# Altium PCB PCB1.PcbDoc
Units mil, origin at the board's own origin, x right, y up, seen from the top; angles counter-clockwise.
Board outline 6000 x 4000 mil, 4 copper layers (Top Layer, Ground, Power, Bottom Layer); 30 components, 63 nets, 223 pads, 0 vias.
Unrouted connection lines stored in the file: 110.
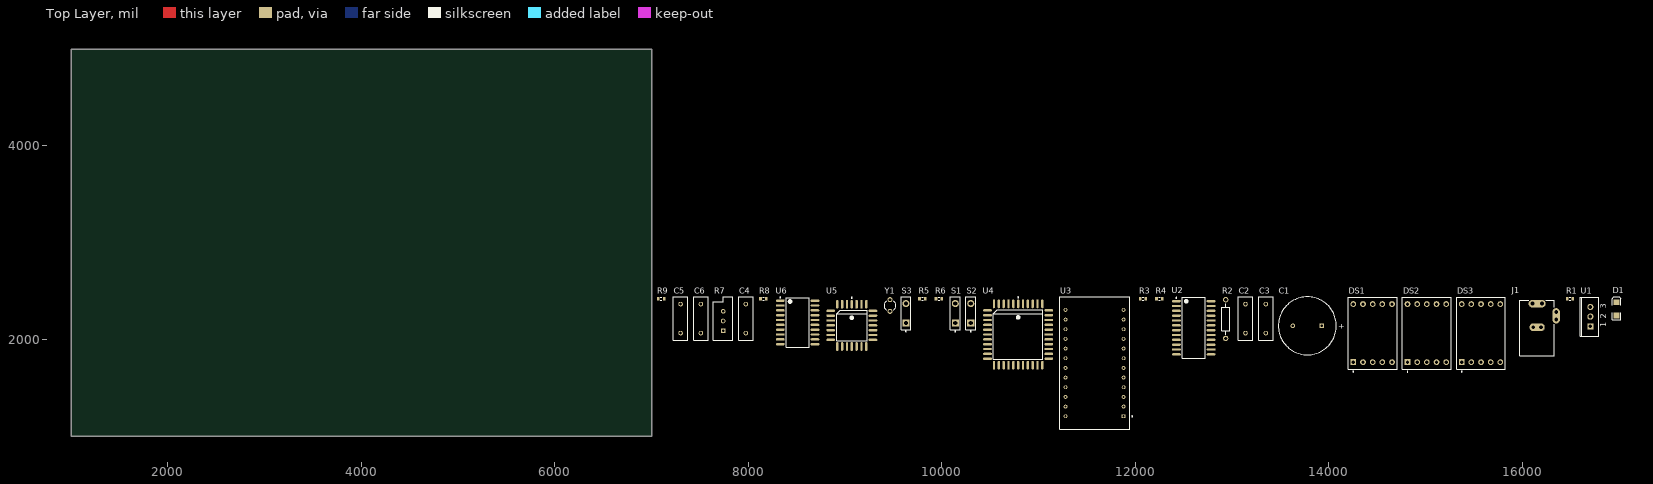
[diagram p0: Top Layer view]
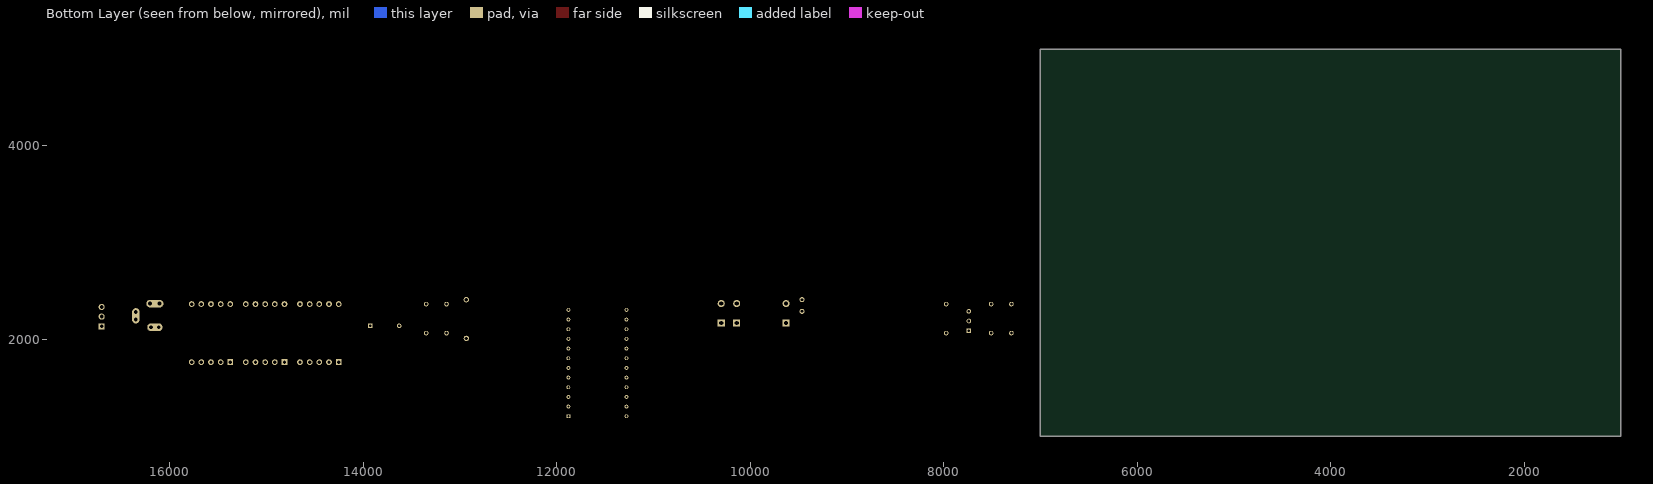
[diagram p1: Bottom Layer view, seen from below]
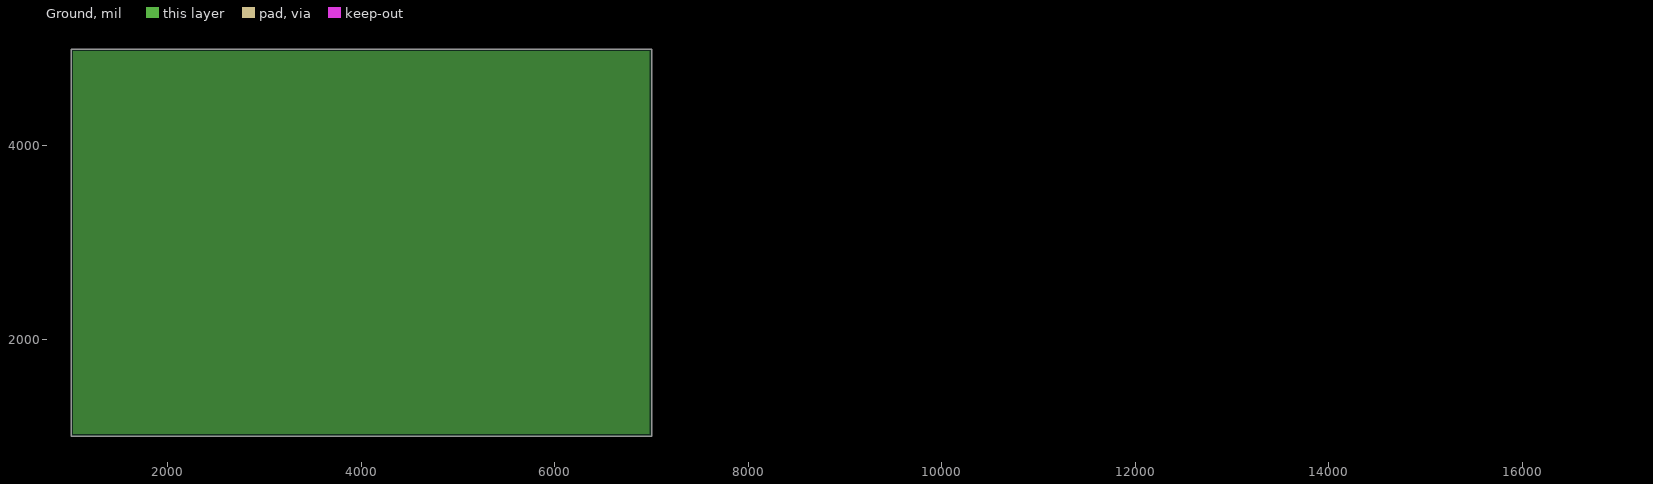
[diagram p2: Ground, clearances drawn from the general rule]
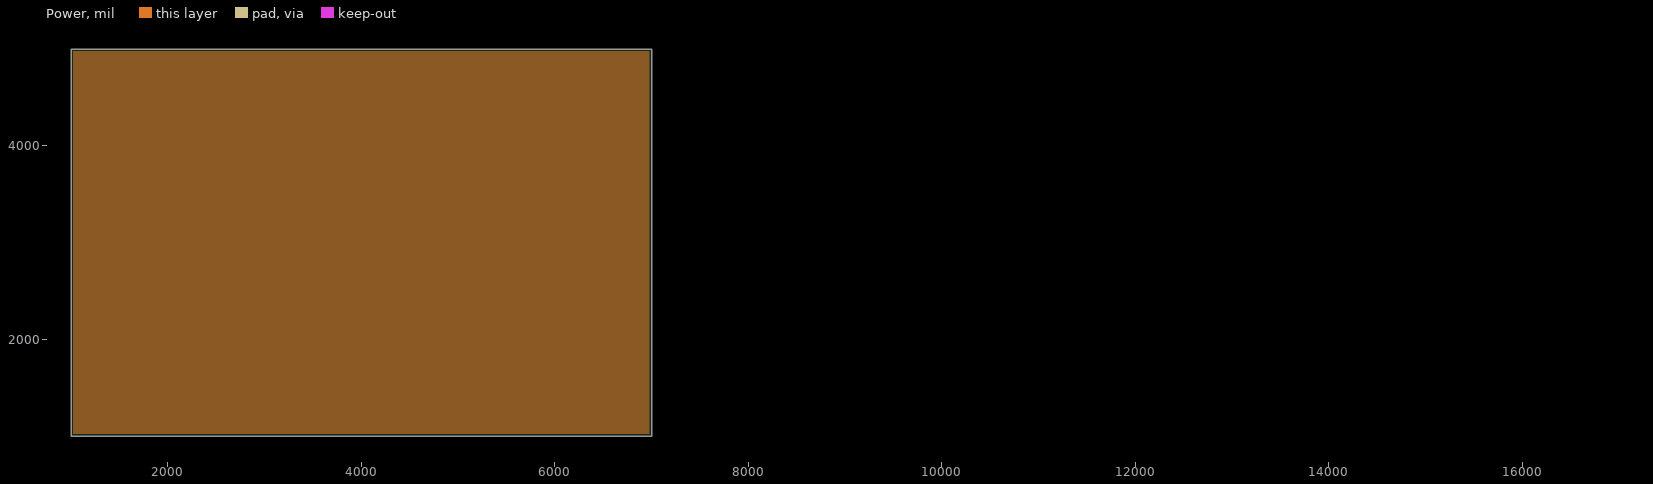
[diagram p3: Power, clearances drawn from the general rule]

## Layer stack, top to bottom
Top Layer: signal copper 1.4
Dielectric: core 12.6, FR-4, Dk 4.8
Ground: plane copper 1.4, net GND
Dielectric: prepreg 12.6, FR-4, Dk 4.8
Power: plane copper 1.4, net VCC
Dielectric: core 12.6, FR-4, Dk 4.8
Bottom Layer: signal copper 1.4

## Board outline
1000,1000 7000,1000 7000,5000 1000,5000

## Design rules (kind name [scope] priority, off if disabled: settings)
Clearance [All] p1: gap=10
PlaneClearance [All] p1: clearance=20
PlaneConnect [All] p1: planeconnectstyle=Relief reliefexpansion=20 reliefentries=4 reliefconductorwidth=10 reliefairgap=10
PolygonConnect [All] p1: connectstyle=Relief reliefconductorwidth=10 reliefentries=4 polygonreliefangle="90 Angle"
RoomDefinition Voltage_Meter [InComponentClass('Voltage_Meter')] p1: confinementstyle=ConfineIn formatcopy=TRUE lockcomponents=FALSE outline 7045,1060 17035,1060 17035,2550 7045,2550
RoutingVias [All] p1: holewidth=28 width=50 viastyle="Through Hole" minholewidth=28 minwidth=50 maxholewidth=28 maxwidth=50
SilkscreenOverComponentPads [All] p1: minsilkscreentomaskgap=10
SolderMaskExpansion [All] p1: expansion=4
Width [All] p1: maxlimit=10 minlimit=10 preferedwidth=10
25 further rules are at their usual default settings.

## Classes and differential pairs
net class VD[0..7]: VD0 VD1 VD2 VD3 VD4 VD5 VD6 VD7
net class AD[0..7]: AD0 AD1 AD2 AD3 AD4 AD5 AD6 AD7
net class A[0..10]: A0 A1 A2 A3 A4 A5 A6 A7 A8 A9 A10

## Components (designator, comment, footprint, x,y, rotation, side; value= is the part's Value field where it differs from the comment)
C1 "Cap Pol1" RB7.6-15 13780,2140 r0 top
C2 "Cap" RAD-0.3 13140,2215 r90 top
C3 "Cap" RAD-0.3 13350,2215 r90 top
C4 "Cap" RAD-0.3 7975,2215 r90 top
C5 "Cap" RAD-0.3 7300,2215 r90 top
C6 "Cap" RAD-0.3 7510,2215 r90 top
D1 "LED2" 3.2X1.6X1.1 16975,2315 r90 top
DS1 "Dpy Blue-CC" H 14455,2065 r0 top
DS2 "Dpy Blue-CC" H 15015,2065 r0 top
DS3 "Dpy Blue-CC" H 15575,2065 r0 top
J1 "PWR2.5" KLD-0202 16155,1830 r90 top
R1 "Res3" J1-0603 16495,2420 r0 top
R2 "Res2" AXIAL-0.4 12935,2210 r90 top
R3 "Res3" J1-0603 12080,2420 r0 top
R4 "Res3" J1-0603 12250,2420 r0 top
R5 "Res3" J1-0603 9800,2420 r0 top
R6 "Res3" J1-0603 9970,2420 r0 top
R7 "RPot" VR5 7740,2190 r90 top
R8 "Res3" J1-0603 8155,2420 r0 top
R9 "Res3" J1-0603 7100,2420 r0 top
S1 "SW-PB" SPST-2 10140,2270 r90 top
S2 "SW-PB" SPST-2 10300,2270 r90 top
S3 "SW-PB" SPST-2 9630,2270 r90 top
U1 "MC7805CT" 221A-04 16705,2235 r90 top
U2 "MAX7219CWG" WSO24_N 12605,2120 r0 top
U3 "M48Z12-200PC1" PCDIP24 11580,1755 r90 top
U4 "P89C52X2FA" SOT187-2_N 10790,2050 r0 top
U5 "ADC0809FN" FN028_N 9070,2145 r0 top
U6 "SN74HC373DW" DW020_N 8510,2175 r0 top
Y1 "XTAL" R38 9465,2350 r0 top

## Footprints (in the part's own frame and the unit in brackets; to place one, negate y for a bottom-side part, rotate by r counter-clockwise, add the part's x,y. Pads: shape width x height; smd on the part's side, far side on the other; paste and mask are expansions set on the pad)
3.2X1.6X1.1 [mm] "SMT LED; 2 Flat Leads"
  rect 1.5x1.5 smd: 1(-1.75,0) 2(1.75,0)
  silkscreen extent -2.9,-1.15 3.2,1.15
221A-04 [mm] "TO, Thru-Hole, Vertical, Heatsink Mounted; 3 In-Line Leads; Pitch 2.54 mm"
  rect 1.6x1.6 hole 1: 1(-2.54,0)
  round 1.6 hole 1: 2(0,0) 3(2.54,0)
  silkscreen extent -5.15,-2.2 5.15,2.7
AXIAL-0.4 [mm] "Axial Device, Thru-Hole; 2 Leads; 0.4 in Pin Spacing"
  round 1.4 hole 0.85: 1(-5.08,0) 2(5.08,0)
  silkscreen extent -4.06,-1.02 4.06,1.02
DW020_N [mm] "SOIC, 20-Leads, Body 12.8x7.5mm, Pitch 1.27mm, IPC Medium Density"
  oval 2.3x0.6 smd: 1(-4.55,5.715) 2(-4.55,4.445) 3(-4.55,3.175) 4(-4.55,1.905) 5(-4.55,0.635) 6(-4.55,-0.635) 7(-4.55,-1.905) 8(-4.55,-3.175) 9(-4.55,-4.445) 10(-4.55,-5.715) 11(4.55,-5.715) 12(4.55,-4.445) 13(4.55,-3.175) 14(4.55,-1.905) 15(4.55,-0.635) 16(4.55,0.635) 17(4.55,1.905) 18(4.55,3.175) 19(4.55,4.445) 20(4.55,5.715)
  silkscreen extent -4.67,-6.5 3,6.69, body extent -3.75,-6.4 3.75,6.4, height 2.65
FN028_N [mm] "Leaded Chip Carrier, 28-Leads, Body 11.5x11.5mm, Pitch 1.27mm, IPC Medium Density"
  oval 0.6x2.3 smd: 1(0,5.55) 2(-1.27,5.55) 3(-2.54,5.55) 4(-3.81,5.55) 12(-3.81,-5.55) 13(-2.54,-5.55) 14(-1.27,-5.55) 15(0,-5.55) 16(1.27,-5.55) 17(2.54,-5.55) 18(3.81,-5.55) 26(3.81,5.55) 27(2.54,5.55) 28(1.27,5.55)
  oval 2.3x0.6 smd: 5(-5.55,3.81) 6(-5.55,2.54) 7(-5.55,1.27) 8(-5.55,0) 9(-5.55,-1.27) 10(-5.55,-2.54) 11(-5.55,-3.81) 19(5.55,-3.81) 20(5.55,-2.54) 21(5.55,-1.27) 22(5.55,0) 23(5.55,1.27) 24(5.55,2.54) 25(5.55,3.81)
  silkscreen extent -4,-4 4,7.37, body extent -5.79,-5.79 5.79,5.79, height 4.58
H [mm] "LED, 7-Segment Display, 14.2 mm, RHD; 10 Leads; Row Space 15.24 mm; Pitch 2.54 mm"
  rect 1.5x1.5 hole 0.9: 1(-5.08,-7.62)
  round 1.5 hole 0.9: 2(-2.54,-7.62) 3(0,-7.62) 4(2.54,-7.62) 5(5.08,-7.62) 6(5.08,7.62) 7(2.54,7.62) 8(0,7.62) 9(-2.54,7.62) 10(-5.08,7.62)
  silkscreen extent -6.4,-10.22 6.4,9.45, body extent -6.4,-9.45 6.4,9.45, height 8.25
J1-0603 [mm] "Chip Resistor, Body 1.6x0.8mm, IPC High Density"
  rect 0.7x0.9 smd: 1(-0.75,0) 2(0.75,0)
  silkscreen extent -0.2,-0.35 0.2,0.35, body extent -0.85,-0.48 0.85,0.48, height 0.9
KLD-0202 [mm] "DC Power Jack, 2.5mm, KLD Series, PCB Mount"
  oval 2x4.5 all layers, no hole: 1(13.7,0)
  round 1.5 hole 1: 1A(13.7,-1.25) 1B(13.7,1.25) 2A(7.5,-1) 2B(7.5,1) 3A(9.5,-5) 3B(11.5,-5)
  oval 2x4 all layers, no hole: 2(7.5,0)
  oval 4x2 all layers, no hole: 3(10.5,-5)
  silkscreen extent 0,-4.5 14.6,4.5
PCDIP24 [mm] "DIP; 24 Rectangular Pins; Row Space 15.24 mm; Pitch 2.54 mm"
  rect 1x1 hole 0.6: 1(-13.97,-7.62)
  round 1 hole 0.6: 2(-11.43,-7.62) 3(-8.89,-7.62) 4(-6.35,-7.62) 5(-3.81,-7.62) 6(-1.27,-7.62) 7(1.27,-7.62) 8(3.81,-7.62) 9(6.35,-7.62) 10(8.89,-7.62) 11(11.43,-7.62) 12(13.97,-7.62) 13(13.97,7.62) 14(11.43,7.62) 15(8.89,7.62) 16(6.35,7.62) 17(3.81,7.62) 18(1.27,7.62) 19(-1.27,7.62) 20(-3.81,7.62) 21(-6.35,7.62) 22(-8.89,7.62) 23(-11.43,7.62) 24(-13.97,7.62)
  silkscreen extent -17.4,-9.98 17.4,9.2
R38 [mm] "Crystal, Thru-Hole; 2 Leads; Body 3.1 x 8.2 mm (Dia.xH)"
  round 1.3 hole 0.7: 1(0,1.55) 2(0,-1.55)
  silkscreen extent -1.55,-1.19 1.55,1.17
RAD-0.3 [mm] "Radial Cap, Thru-Hole; 2 Leads; 0.3 in Pin Spacing"
  round 1.2 hole 0.7: 1(-3.81,0) 2(3.81,0)
  silkscreen extent -5.71,-1.91 5.71,1.91
RB7.6-15 [mm] "Polarized Capacitor (Radial); 2 Leads"
  rect 1.2x1.2 hole 0.7: 1(3.81,0)
  round 1.2 hole 0.7: 2(-3.81,0)
  silkscreen extent -7.62,-7.62 7.62,7.62
SOT187-2_N [mm] "Leaded Chip Carrier, 44-Leads, Body 16.6x16.6mm, Pitch 1.27mm, IPC Medium Density"
  oval 0.6x2.3 smd: 1(0,8.05) 2(-1.27,8.05) 3(-2.54,8.05) 4(-3.81,8.05) 5(-5.08,8.05) 6(-6.35,8.05) 18(-6.35,-8.05) 19(-5.08,-8.05) 20(-3.81,-8.05) 21(-2.54,-8.05) 22(-1.27,-8.05) 23(0,-8.05) 24(1.27,-8.05) 25(2.54,-8.05) 26(3.81,-8.05) 27(5.08,-8.05) 28(6.35,-8.05) 40(6.35,8.05) 41(5.08,8.05) 42(3.81,8.05) 43(2.54,8.05) 44(1.27,8.05)
  oval 2.3x0.6 smd: 7(-8.05,6.35) 8(-8.05,5.08) 9(-8.05,3.81) 10(-8.05,2.54) 11(-8.05,1.27) 12(-8.05,0) 13(-8.05,-1.27) 14(-8.05,-2.54) 15(-8.05,-3.81) 16(-8.05,-5.08) 17(-8.05,-6.35) 29(8.05,-6.35) 30(8.05,-5.08) 31(8.05,-3.81) 32(8.05,-2.54) 33(8.05,-1.27) 34(8.05,0) 35(8.05,1.27) 36(8.05,2.54) 37(8.05,3.81) 38(8.05,5.08) 39(8.05,6.35)
  silkscreen extent -6.5,-6.5 6.5,9.87, body extent -8.33,-8.33 8.33,8.33, height 4.57
SPST-2 [mm] "Switch; 2 Leads"
  rect 1.85x1.85 hole 1.1: 1(-2.54,0)
  round 1.85 hole 1.1: 2(2.54,0)
  silkscreen extent -4.89,-1.27 4.28,1.27
VR5 [mm] "Thru-Hole; 3 Leads"
  rect 1.2x1.2 hole 0.7: 1(-2.54,0)
  round 1.2 hole 0.7: 2(0,0) 3(2.54,0)
  silkscreen extent -5.08,-2.54 6.35,2.54
WSO24_N [mm] "SOIC, 24-Leads, Body 15.4x7.5mm, Pitch 1.27mm, IPC Medium Density"
  oval 2.3x0.6 smd: 1(-4.55,6.985) 2(-4.55,5.715) 3(-4.55,4.445) 4(-4.55,3.175) 5(-4.55,1.905) 6(-4.55,0.635) 7(-4.55,-0.635) 8(-4.55,-1.905) 9(-4.55,-3.175) 10(-4.55,-4.445) 11(-4.55,-5.715) 12(-4.55,-6.985) 13(4.55,-6.985) 14(4.55,-5.715) 15(4.55,-4.445) 16(4.55,-3.175) 17(4.55,-1.905) 18(4.55,-0.635) 19(4.55,0.635) 20(4.55,1.905) 21(4.55,3.175) 22(4.55,4.445) 23(4.55,5.715) 24(4.55,6.985)
  silkscreen extent -4.67,-7.95 3,7.96, body extent -3.8,-7.8 3.8,7.8, height 2.65

## Part data
C1: "Polarized Capacitor (Radial)"
C2 C3 C4 C5 C6: "Capacitor"
D1: "Typical RED, GREEN, YELLOW, AMBER GaAs LED"
DS1 DS2 DS3: "14.2 mm General Purpose Blue 7-Segment Display: CC, RH DP, Gray Surface"
J1: "Low Voltage Power Supply Connector"
R1 R2 R3 R4 R5 R6 R8 R9: "Resistor"
R7: "Potentiometer"
S1 S2 S3: "Switch"
U1: "3-Terminal Positive Fixed Voltage Regulator"
U2: "Serially Interfaced, 8-Digit LED Display Driver"
U3: "16 Kbit (2Kb x 8) Zeropower SRAM"
U4: "80C51 8-Bit Flash Microcontroller Family, 8 kB Flash"
U5: "CMOS Analog-to-Digital Converter with 8-Channel Multiplexer"
U6: "Octal Transparent D-Type Latches with 3-State Outputs"
Y1: "Crystal Oscillator"

## Nets (pads, with @x,y where several pads share a name; then routed paths per layer and width w, separated by ;. In a path a pad name is that pad's centre, name@x,y a point inside that pad or via, vN(x,y) a via of type N, cw(c..) or ccw(c..) an arc to the next point about the centre after c; other vN are vias at no path point)
A: U2.14
A0: U3.8 U6.2
A1: U3.7 U6.5
A2: U3.6 U6.6
A3: U3.5 U6.9
A4: U3.4 U6.12
A5: U3.3 U6.15
A6: U3.2 U6.16
A7: U3.1 U6.19
A8: U3.23 U4.24
A9: U3.22 U4.25
A10: U3.19 U4.26
AD0: U3.9 U4.43 U6.3
AD1: U3.10 U4.42 U6.4
AD2: U3.11 U4.41 U6.7
AD3: U3.13 U4.40 U6.8
AD4: U3.14 U4.39 U6.13
AD5: U3.15 U4.38 U6.14
AD6: U3.16 U4.37 U6.17
AD7: U3.17 U4.36 U6.18
ALE: U4.33 U6.11
B: U2.16
C: U2.20
CLK: U2.13 U4.28
CLK1: U4.17 U5.10
D: U2.23
DIG0: DS1.3 DS1.8 U2.2
DIG1: DS2.3 DS2.8 U2.11
DIG2: DS3.3 DS3.8 U2.6
DIN: U2.1 U4.13
DP: U2.22
E: U2.21
EOC: U4.14 U5.7
F: U2.15
G: U2.17
GND: C1.2 C2.1 C3.1 C5.1 C6.1 J1.1 J1.1A J1.1B R1.2 R5.1 R6.1 R7.2 R9.1 U1.2 U2.4 U2.9 U3.12 U3.18 U4.22 U5.13 U5.16 U5.23 U5.24 U5.25 U6.1 U6.10
LOAD: U2.12 U4.11
NetC1_1: C1.1 C2.2 J1.2 J1.2A J1.2B U1.1
NetC5_2: C5.2 U4.20 Y1.1
NetC6_2: C6.2 U4.21 Y1.2
NetD1_2: D1.2 R1.1
NetJ1_3: J1.3 J1.3A J1.3B
NetR2_1: R2.1 U2.18
NetR3_1: R3.1 S1.2
NetR4_1: R4.1 S2.2
NetR5_2: R5.2 S1.1 U4.30
NetR6_2: R6.2 S2.1 U4.31
NetR7_3: R7.3 U5.26
NetR8_2: R8.2 S3.2
OE: U4.15 U5.9
R\D\: U3.20 U4.18
RST: C4.1 R8.1 R9.2 U4.10
ST: U4.16 U5.6 U5.22
VCC: C3.2 C4.2 D1.1 R2.2 R3.2 R4.2 R7.1 S3.1 U1.3 U2.19 U3.24 U4.35 U4.44 U5.11 U5.12 U6.20
VD0: U4.2 U5.17
VD1: U4.3 U5.14
VD2: U4.4 U5.15
VD3: U4.5 U5.8
VD4: U4.6 U5.18
VD5: U4.7 U5.19
VD6: U4.8 U5.20
VD7: U4.9 U5.21
W\R\: U3.21 U4.19
pads on no net: DS1.1 DS1.2 DS1.4 DS1.5 DS1.6 DS1.7 DS1.9 DS1.10 DS2.1 DS2.2 DS2.4 DS2.5 DS2.6 DS2.7 DS2.9 DS2.10 DS3.1 DS3.2 DS3.4 DS3.5 DS3.6 DS3.7 DS3.9 DS3.10 U2.3 U2.5 U2.7 U2.8 U2.10 U2.24 U4.1 U4.12 U4.23 U4.27 U4.29 U4.32 U4.34 U5.1 U5.2 U5.3 U5.4 U5.5 U5.27 U5.28

## Polygon pours and split planes (outlines as drawn)
GND on Ground (split plane): 6979.9,1020.1 1020.1,1020.1 1020.1,4979.9 6979.9,4979.9
VCC on Power (split plane): 6979.9,1020.1 1020.1,1020.1 1020.1,4979.9 6979.9,4979.9

## Text inside footprints (layer, text, board x,y; h text height)
C1: Top Overlay "+" at 14100.15,2110.99 h59.06
J1: Mechanical 1 "Mech 2 - Clearance, move to internal plane if present" at 15955.56,1841.26 h11.81 r90; Mechanical 1 "Mech 1 - Slot cut-out" at 15935.87,1841.26 h11.81 r90; Mechanical 1 "Assign keep-out area to slot" at 15896.5,1841.26 h11.81 r90; Mechanical 1 "Alert PCB fab to slot details" at 15916.18,1841.26 h11.81 r90
U1: Top Overlay "1" at 16869.37,2125.16 h59.06 r90; Top Overlay "2" at 16869.37,2215.32 h59.06 r90; Top Overlay "3" at 16869.37,2315.32 h59.06 r90